# Altium PCB RobonAUT_PCB.PcbDoc
Units mm, origin at the board's own origin, x right, y up, seen from the top; angles counter-clockwise.
Board outline 220 x 140 mm, 2 copper layers (Top Layer, Bottom Layer), stack 1.586 mm thick; 37 components, 61 nets, 288 pads, 16 vias.
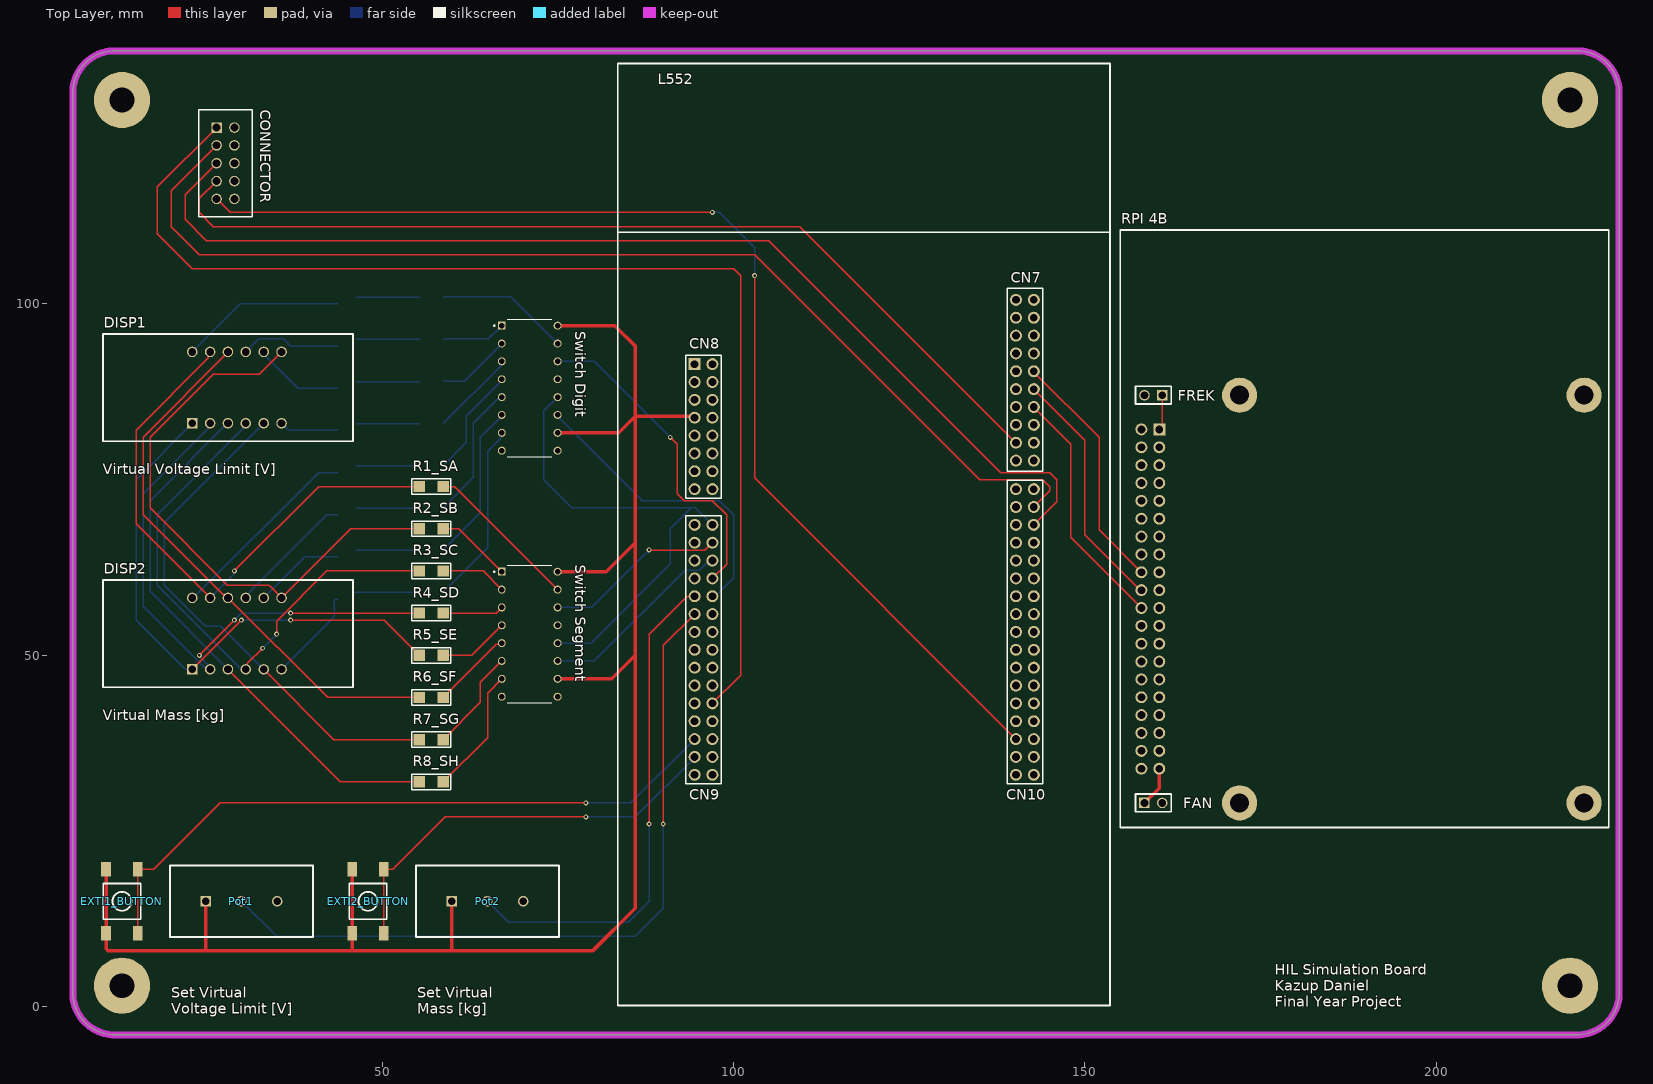
[diagram p0: Top Layer view]
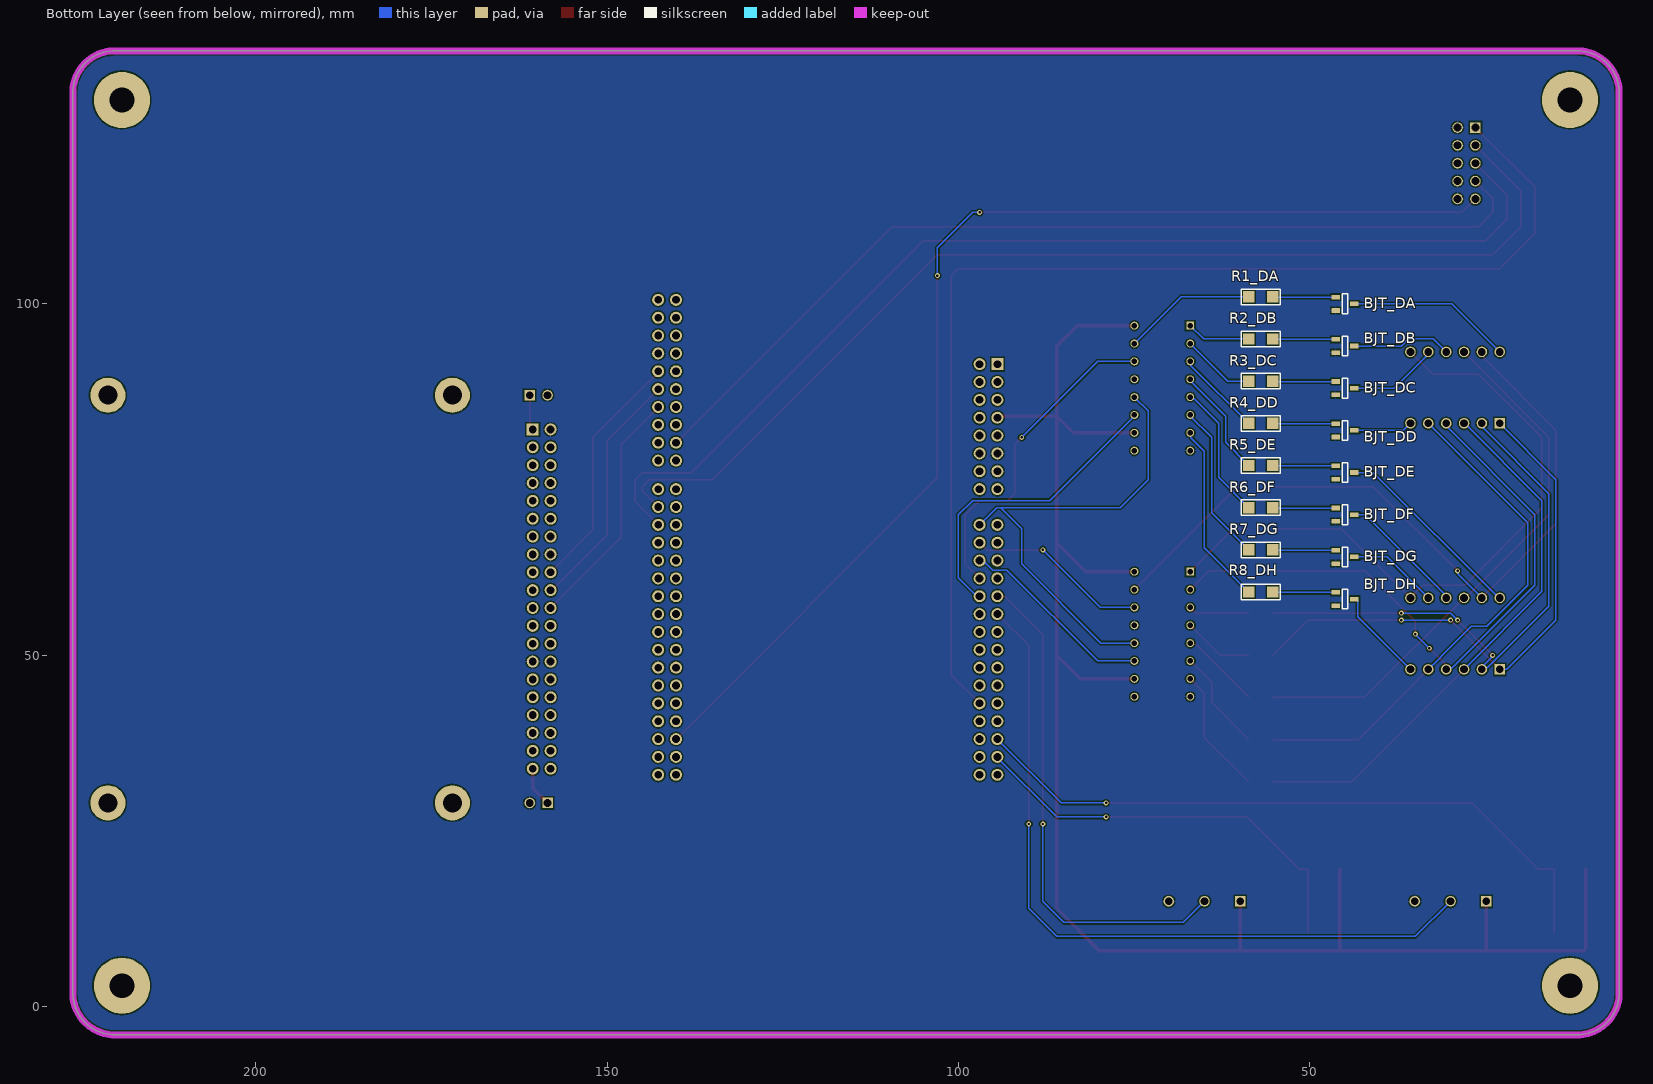
[diagram p1: Bottom Layer view, seen from below]
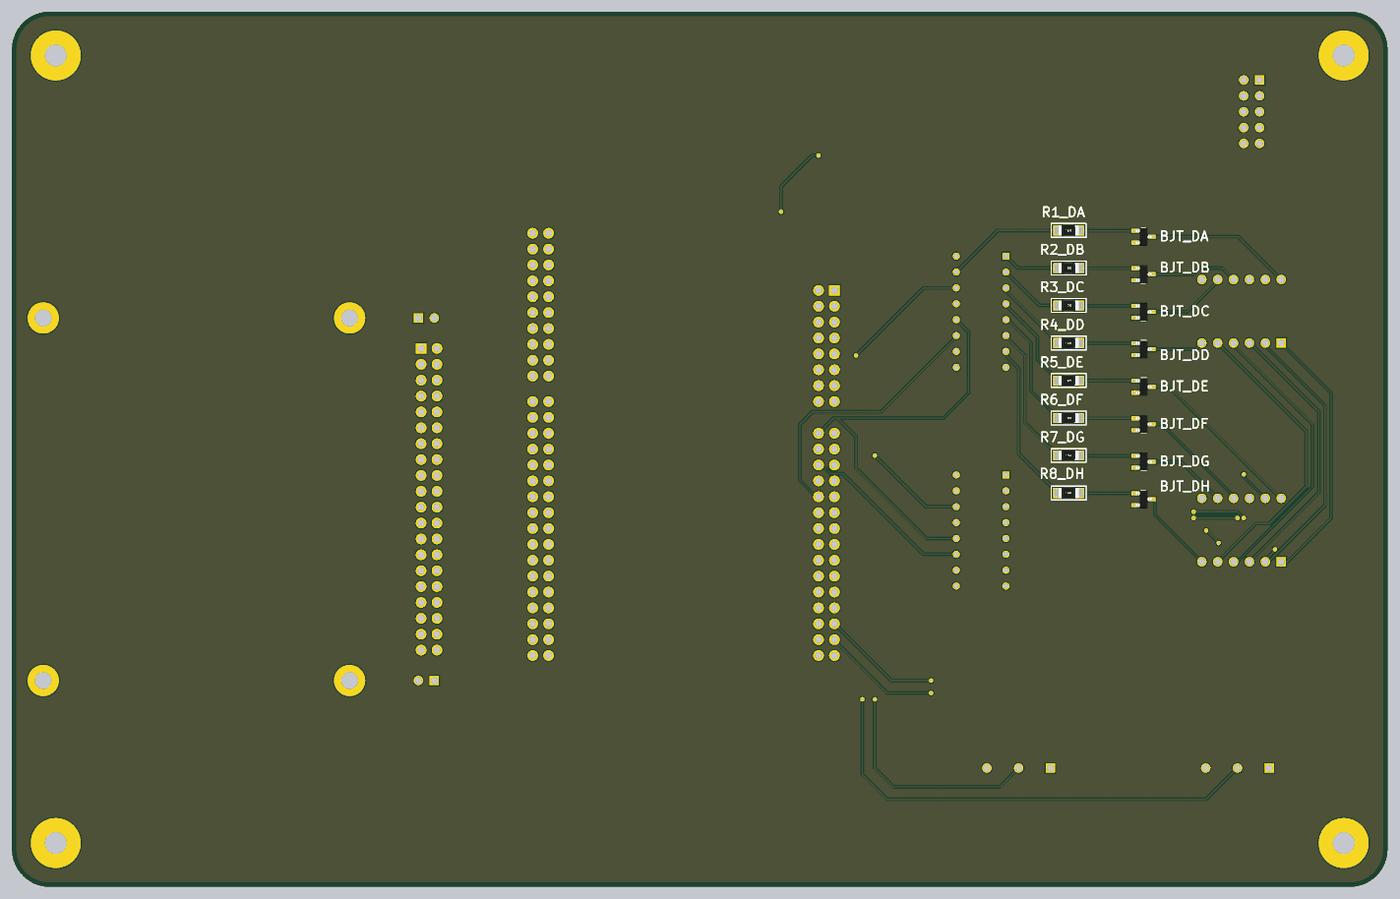
[diagram p2: 3D render of the assembled board from below, using the file's embedded part models]

## Layer stack, top to bottom
Top Solder: solder mask 0.0102, Solder Resist, Dk 3.5
Top Layer: signal copper 0.018
Dielectric1: core 1.55, FR-4, Dk 4.8
Bottom Layer: signal copper 0.018
Bottom Solder: solder mask 0.0102, Solder Resist, Dk 3.5

## Board outline
12,-4 220,-4 ccw(c220,2) 226,2 226,130 ccw(c220,130) 220,136 12,136 ccw(c12,130) 6,130 6,2 ccw(c12,2)

## Design rules (kind name [scope] priority, off if disabled: settings)
BoardOutlineClearance [All] p1: gap=0.25 ignorepadtopadclearanceinfootprint=FALSE
Clearance Clearance-xPP-xTP-xTT [All] p1: gap=0.15 ignorepadtopadclearanceinfootprint=FALSE except(0: Arc-Hole Track-Hole SMDPad-Hole THPad-Hole Via-Hole Fill-Hole Poly-Hole Region-Hole Text-Hole; 0.2: Arc-Poly Track-Poly SMDPad-Poly THPad-Poly Via-Poly Fill-Poly Poly-Poly)
ComponentClearance [All] p1: gap=0.25 collisioncheckmode=3 verticalgap=0.25 showdistances=FALSE
DiffPairsRouting [All] p1: maxlimit=0.25 minlimit=0.25 mostfreqgap=0.25 toplayer_minwidth=0.381 toplayer_maxwidth=0.381 toplayer_prefwidth=0.381 bottomlayer_minwidth=0.381 bottomlayer_maxwidth=0.381 bottomlayer_prefwidth=0.381 maxuncoupledlength=12.5
Height [All] p1: minheight=0 maxheight=45 prefheight=12.5
HoleSize HoleSize-PTH [All] p1: absolutevalues=TRUE maxlimit=5 minlimit=0.25 maxpercent=80.000 minpercent=20.000
HoleToHoleClearance [All] p1: gap=0.4 allowstackedmicrovias=TRUE
MinimumAnnularRing [All] p1: minimumring=0.125
MinimumSolderMaskSliver [All] p1: minsoldermaskwidth=0.08
PasteMaskExpansion [All] p1: expansion=-0.2
PlaneClearance PlaneClearance-IPI [All] p1: clearance=0.2
PlaneConnect [All] p1: pad.planeconnectstyle=Relief pad.reliefexpansion=0.175 pad.reliefentries=4 pad.reliefconductorwidth=0.2 pad.reliefairgap=0.2 via.planeconnectstyle=Direct via.reliefexpansion=0.175 via.reliefentries=4 via.reliefconductorwidth=0.2 via.reliefairgap=0.2
PolygonConnect PolygonConnect-xTW [All] p1: thpad.connectstyle=Relief thpad.reliefconductorwidth=0.2 thpad.reliefentries=4 thpad.polygonreliefangle="90 Angle" thpad.airgapwidth=0.2 smdpad.connectstyle=Relief smdpad.reliefconductorwidth=0.2 smdpad.reliefentries=4 smdpad.polygonreliefangle="90 Angle" smdpad.airgapwidth=0.2 via.connectstyle=Direct via.reliefconductorwidth=0.2 via.reliefentries=4 via.polygonreliefangle="90 Angle" via.airgapwidth=0.2
RoutingCorners [All] p1: cornerstyle=45-Degree minsetback=2.5 maxsetback=2.5
RoutingVias [All] p1: holewidth=0.35 width=0.7 viastyle="Through Hole" minholewidth=0.25 minwidth=0.6 maxholewidth=1.2 maxwidth=1.6
SilkToSilkClearance [All] p1: silktosilkclearance=0.05
SilkToSolderMaskClearance SilkscreenOverComponentPads [IsPad] p1: minsilkscreentomaskgap=0.15 clearancetoexposedcopper=TRUE
SolderMaskExpansion [All] p1: expansion=0 istentingtop=FALSE
SupplyNets "Schematic Supply Nets_1" [InNet('GND')] p1: voltage=0.000
SupplyNets "Schematic Supply Nets" [InNet('3V3')] p2: voltage=0.000
UnRoutedNet [All] p1: checkbadconnections=TRUE
Width Width-xTW [All] p1: maxlimit=3 minlimit=0.15 preferedwidth=0.2
17 further rules are at their usual default settings.

## Classes and differential pairs
component class MainSch: CONNECTOR FAN FREK L552 "RPI 4B"
component class HMISch: BJT_DA BJT_DB BJT_DC BJT_DD BJT_DE BJT_DF BJT_DG BJT_DH DISP1 DISP2 EXTI1_BUTTON EXTI2_BUTTON Pot1 Pot2 R1_DA R1_SA R2_DB R2_SB R3_DC R3_SC R4_DD R4_SD R5_DE R5_SE R6_DF R6_SF R7_DG R7_SG R8_DH R8_SH "Switch Digit" "Switch Segment"

## Components (designator, comment, footprint, x,y, rotation, side; value= is the part's Value field where it differs from the comment)
BJT_DA "BC817" FP_SOT23-3 45,100 r0 bottom
BJT_DB "BC817" FP_SOT23-3 45,94 r0 bottom
BJT_DC "BC817" FP_SOT23-3 45,88 r0 bottom
BJT_DD "BC817" FP_SOT23-3 45,82 r0 bottom
BJT_DE "BC817" FP_SOT23-3 45,76 r0 bottom
BJT_DF "BC817" FP_SOT23-3 45,70 r0 bottom
BJT_DG "BC817" FP_SOT23-3 45,64 r0 bottom
BJT_DH "BC817" FP_SOT23-3 45,58 r0 bottom
CONNECTOR "Connector 10" CONNECTOR-10P 26.46,125.08 r0 top locked
DISP1 "7SegDisp" 3461AS_FP 23,83 r90 top locked
DISP2 "7SegDisp" 3461AS_FP 23,48 r90 top locked
EXTI1_BUTTON "Button" FP_BTN_SMD 13,15 r0 top locked
EXTI2_BUTTON "Button" FP_BTN_SMD 48,15 r0 top locked
FAN "Venti" FP_CONN2_TUSKE_254MM 158.46,29 r270 top locked
FREK "FreqMeas" FP_CONN2_TUSKE_254MM 161,87 r90 top locked
L552 "NUCLEO-L552_soldered_pins" "FP_NUCLEO-144 inner connector" 86.84,101.58 r0 top locked
Pot1 "Connector" Potmeter_3C_FP 24.92,15 r90 top locked
Pot2 "Connector" Potmeter_3C_FP 59.92,15 r90 top locked
R1_DA "4.7K" FP_1206_RES 57,101 r180 bottom
R1_SA "100" FP_1206_RES 57,74 r180 top
R2_DB "4.7K" FP_1206_RES 57,95 r180 bottom
R2_SB "100" FP_1206_RES 57,68 r180 top
R3_DC "4.7K" FP_1206_RES 57,89 r180 bottom
R3_SC "100" FP_1206_RES 57,62 r180 top
R4_DD "4.7K" FP_1206_RES 57,83 r180 bottom
R4_SD "100" FP_1206_RES 57,56 r180 top
R5_DE "4.7K" FP_1206_RES 57,77 r180 bottom
R5_SE "100" FP_1206_RES 57,50 r180 top
R6_DF "4.7K" FP_1206_RES 57,71 r180 bottom
R6_SF "100" FP_1206_RES 57,44 r180 top
R7_DG "4.7K" FP_1206_RES 57,65 r180 bottom
R7_SG "100" FP_1206_RES 57,38 r180 top
R8_DH "4.7K" FP_1206_RES 57,59 r180 bottom
R8_SH "100" FP_1206_RES 57,32 r180 top
"RPI 4B" "Raspberry Pi 4B flipped" "Raspberry Pi 4B flipped" 172,87 r270 top locked
"Switch Digit" "SN74HC595N" DIP794W45P254L1969H508Q16 71,88 r0 top locked
"Switch Segment" "SN74HC595N" DIP794W45P254L1969H508Q16 71,53 r0 top locked

## Footprints (in the part's own frame and the unit in brackets; to place one, negate y for a bottom-side part, rotate by r counter-clockwise, add the part's x,y. Pads: shape width x height; smd on the part's side, far side on the other; paste and mask are expansions set on the pad)
3461AS_FP [mm] "7 segment display footprint"
  rect 1.5x1.5 hole 1.1: 1(0,0)
  round 1.5 hole 1.1: 2(10.16,0) 3(0,-2.54) 4(10.16,-2.54) 5(0,-5.08) 6(10.16,-5.08) 7(0,-7.62) 8(10.16,-7.62) 9(0,-10.16) 10(10.16,-10.16) 11(0,-12.7) 12(10.16,-12.7)
  silkscreen extent -2.54,-22.86 12.7,12.7
CONNECTOR-10P [mm]
  rect 1.5x1.5 hole 1.1: 1(0,0)
  round 1.5 hole 1.1: 2(2.54,0) 3(0,-2.54) 4(2.54,-2.54) 5(0,-5.08) 6(2.54,-5.08) 7(0,-7.62) 8(2.54,-7.62) 9(0,-10.16) 10(2.54,-10.16)
  silkscreen extent -2.54,-12.7 5.08,2.54
DIP794W45P254L1969H508Q16 [mm]
  rect 1.13x1.13 hole 0.78: 1(-3.97,8.89)
  round 1.13 hole 0.78: 2(-3.97,6.35) 3(-3.97,3.81) 4(-3.97,1.27) 5(-3.97,-1.27) 6(-3.97,-3.81) 7(-3.97,-6.35) 8(-3.97,-8.89) 9(3.97,-8.89) 10(3.97,-6.35) 11(3.97,-3.81) 12(3.97,-1.27) 13(3.97,1.27) 14(3.97,3.81) 15(3.97,6.35) 16(3.97,8.89)
  silkscreen extent -5.13,-9.77 3.17,9.77
FP_1206_RES [mm] "1206 ellenállás"
  rect 1.6x1.6 smd: 1(-1.7,0) 2(1.7,0)
  silkscreen extent -2.8,-1.1 2.8,1.1, body extent -1.6,-0.8 1.6,0.8, height 0.62
FP_BTN_SMD [mm] "SMD Push Button 6x6mm"
  rect 1.4x2.1 smd: 1(2.25,4.55) 2(2.25,-4.55) 3(-2.25,4.55) 4(-2.25,-4.55)
  silkscreen extent -2.67,-2.54 2.67,2.54, body extent -3,-5 3,5, height 5.1
FP_CONN2_TUSKE_254MM [mm] "2×1 tüskesor"
  rect 1.5x1.5 hole 1.1: 1(0,0)
  round 1.5 hole 1.1: 2(0,2.54)
  silkscreen extent -1.27,-1.27 1.27,3.81, body extent -1.27,-1.27 1.27,3.81, height 8.54
"FP_NUCLEO-144 inner connector" [mm]
  rect 1.7x1.7 hole 1.1: 1(7.62,-10.16)
  round 1.7 hole 1.1: 2(7.62,-12.7) 3(7.62,-15.24) 4(7.62,-17.78) 5(7.62,-20.32) 6(7.62,-22.86) 7(7.62,-25.4) 8(7.62,-27.94) 9(7.62,-33.02) 10(7.62,-35.56) 11(7.62,-38.1) 12(7.62,-40.64) 13(7.62,-43.18) 14(7.62,-45.72) 15(7.62,-48.26) 16(7.62,-50.8) 17(7.62,-53.34) 18(7.62,-55.88) 19(7.62,-58.42) 20(7.62,-60.96) 21(7.62,-63.5) 22(7.62,-66.04) 23(7.62,-68.58) 24(10.16,-10.16) 25(10.16,-12.7) 26(10.16,-15.24) 27(10.16,-17.78) 28(10.16,-20.32) 29(10.16,-22.86) 30(10.16,-25.4) 31(10.16,-27.94) 32(10.16,-33.02) 33(10.16,-35.56) 34(10.16,-38.1) 35(10.16,-40.64) 36(10.16,-43.18) 37(10.16,-45.72) 38(10.16,-48.26) 39(10.16,-50.8) 40(10.16,-53.34) 41(10.16,-55.88) 42(10.16,-58.42) 43(10.16,-60.96) 44(10.16,-63.5) 45(10.16,-66.04) 46(10.16,-68.58) 47(53.34,-1.016) 48(53.34,-3.556) 49(53.34,-6.096) 50(53.34,-8.636) 51(53.34,-11.176) 52(53.34,-13.716) 53(53.34,-16.256) 54(53.34,-18.796) 55(53.34,-21.336) 56(53.34,-23.876) 57(53.34,-27.94) 58(53.34,-30.48) 59(53.34,-33.02) 60(53.34,-35.56) 61(53.34,-38.1) 62(53.34,-40.64) 63(53.34,-43.18) 64(53.34,-45.72) 65(53.34,-48.26) 66(53.34,-50.8) 67(53.34,-53.34) 68(53.34,-55.88) 69(53.34,-58.42) 70(53.34,-60.96) 71(53.34,-63.5) 72(53.34,-66.04) 73(53.34,-68.58) 74(55.88,-1.016) 75(55.88,-3.556) 76(55.88,-6.096) 77(55.88,-8.636) 78(55.88,-11.176) 79(55.88,-13.716) 80(55.88,-16.256) 81(55.88,-18.796) 82(55.88,-21.336) 83(55.88,-23.876) 84(55.88,-27.94) 85(55.88,-30.48) 86(55.88,-33.02) 87(55.88,-35.56) 88(55.88,-38.1) 89(55.88,-40.64) 90(55.88,-43.18) 91(55.88,-45.72) 92(55.88,-48.26) 93(55.88,-50.8) 94(55.88,-53.34) 95(55.88,-55.88) 96(55.88,-58.42) 97(55.88,-60.96) 98(55.88,-63.5) 99(55.88,-66.04) 100(55.88,-68.58)
  silkscreen extent -3.3,-101.4 66.72,32.6, body extent -3.29,-101.4 66.71,32.6, height 18.5
FP_SOT23-3 [mm] "SOT23-3 tok"
  rect 1.2x0.65 smd: 1(1.327,-0.95) 2(1.327,0.95) 3(-1.327,0)
  silkscreen extent -0.4,-1.4 0.4,1.4, body extent -1.27,-1.46 1.27,1.46, height 0.97
Potmeter_3C_FP [mm] "3 pin potmeter"
  rect 1.5x1.5 hole 1.1: 1(0,0)
  round 1.5 hole 1.1: 2(0,-5.08) 3(0,-10.16)
  silkscreen extent -5.08,-15.24 5.08,5.08
"Raspberry Pi 4B flipped" [mm]
  round 5 hole 2.7: 0(0,49) 0(0,0) 0(58,49) 0(58,0)
  round 1.7 hole 1.1: 1(4.87,-13.97) 3(7.41,-13.97) 4(7.41,-11.43) 5(9.95,-13.97) 6(9.95,-11.43) 7(12.49,-13.97) 8(12.49,-11.43) 9(15.03,-13.97) 10(15.03,-11.43) 11(17.57,-13.97) 12(17.57,-11.43) 13(20.11,-13.97) 14(20.11,-11.43) 15(22.65,-13.97) 16(22.65,-11.43) 17(25.19,-13.97) 18(25.19,-11.43) 19(27.73,-13.97) 20(27.73,-11.43) 21(30.27,-13.97) 22(30.27,-11.43) 23(32.81,-13.97) 24(32.81,-11.43) 25(35.35,-13.97) 26(35.35,-11.43) 27(37.89,-13.97) 28(37.89,-11.43) 29(40.43,-13.97) 30(40.43,-11.43) 31(42.97,-13.97) 32(42.97,-11.43) 33(45.51,-13.97) 34(45.51,-11.43) 35(48.05,-13.97) 36(48.05,-11.43) 37(50.59,-13.97) 38(50.59,-11.43) 39(53.13,-13.97) 40(53.13,-11.43)
  rect 1.7x1.7 hole 1.1: 2(4.87,-11.43)
  silkscreen extent -23.49,-17 61.5,52.5, body extent 3.28,-15.24 54.72,-10.16, height 9

## Part data
BJT_DA BJT_DB BJT_DC BJT_DD BJT_DE BJT_DF BJT_DG BJT_DH: "NPN General-purpose Transistor", ComponentLink1Description="Manufacturer Link", ComponentLink1URL=http://www.semiconductors.philips.com/, ComponentLink2Description=Datasheet, ComponentLink2URL=http://www.semiconductors.philips.com/acrobat/datasheets/BC817_BC817W_BC337_5.pdf
CONNECTOR: library part "Connector 10 spec", "Special 10 pin ribbon connector"
DISP1 DISP2: library part 3461AS, "7 segment display sch"
EXTI1_BUTTON EXTI2_BUTTON: library part "Button 4P", "Push button"
FAN FREK: library part Connector_2pin, "2pin connector"
L552: library part NUCLEO-L552_inner, "https://www.st.com/resource/en/user_manual/um2581-stm32l5-nucleo144-board-mb1361-stmicroelectronics.pdf"
Pot1 Pot2: library part Potmeter_3pin, "3pin connector"
R1_DA R1_SA R2_DB R2_SB R3_DC R3_SC R4_DD R4_SD R5_DE R5_SE R6_DF R6_SF R7_DG R7_SG R8_DH R8_SH: library part RES, "Resistor"
"Switch Digit" "Switch Segment": Package=None, Availability=Unavailable, MP=SN74HC595N, Price=None

## Free pads (board coordinates)
  round 8 hole 3.5: 1(13,129) 2(13,3) 3(219,3) 4(219,129)

## Via types
v1: diameter 0.7, hole 0.35, Top Layer to Bottom Layer, 16 vias

## Nets (pads, with @x,y where several pads share a name; then routed paths per layer and width w, separated by ;. In a path a pad name is that pad's centre, name@x,y a point inside that pad or via, vN(x,y) a via of type N, cw(c..) or ccw(c..) an arc to the next point about the centre after c; other vN are vias at no path point)
3V3: "Switch Digit.10" "Switch Digit.16" "Switch Segment.10" "Switch Segment.16" EXTI1_BUTTON.3 EXTI1_BUTTON.4 EXTI2_BUTTON.3 EXTI2_BUTTON.4 L552.4 Pot1.1 Pot2.1 | length 252.8
  Top Layer w0.2: 24.92,8.08 25,8 ; 45.75,8.25 46,8 ; 59.92,8.08 60,8 ; L552.4@94.26,84 L552.4
  Top Layer w0.5: EXTI1_BUTTON.3 EXTI1_BUTTON.4 10.75,8.25 11,8 25,8 46,8 60,8 80,8 86,14 86,50 ; 24.92,8.08 Pot1.1 ; 45.75,8.25 EXTI2_BUTTON.4 EXTI2_BUTTON.3 ; 59.92,8.08 Pot2.1 ; 74.97,46.65 82.65,46.65 86,50 ; 74.97,61.89 81.89,61.89 86,66 ; 74.97,81.65 83.65,81.65 86,84 ; 74.97,96.89 83.11,96.89 86,94 86,84 ; L552.4@94.26,84 86,84 ; 86,50 86,66 ; 86,66 86,84
GND: "RPI 4B.1" "RPI 4B.8" "RPI 4B.12" "RPI 4B.15" "RPI 4B.28" "RPI 4B.31" "RPI 4B.36" "Switch Digit.8" "Switch Digit.13" "Switch Segment.8" "Switch Segment.13" BJT_DA.2 BJT_DB.2 BJT_DC.2 BJT_DD.2 BJT_DE.2 BJT_DF.2 BJT_DG.2 BJT_DH.2 CONNECTOR.2 CONNECTOR.4 CONNECTOR.6 CONNECTOR.8 CONNECTOR.10 FAN.2 FREK.2 L552.6 L552.7 L552.20 L552.37 L552.59 L552.65 L552.70 L552.77 L552.94 Pot1.3 Pot2.3
NetBJT_DA_1: BJT_DA.1 R1_DA.2 | length 9
  Bottom Layer w0.2: BJT_DA.1 55.25,100.95 R1_DA.2
NetBJT_DA_3: BJT_DA.3 DISP1.2 | length 23.5
  Bottom Layer w0.2: DISP1.2 29.84,100 BJT_DA.3
NetBJT_DB_1: BJT_DB.1 R2_DB.2 | length 9
  Bottom Layer w0.2: BJT_DB.1 55.25,94.95 R2_DB.2
NetBJT_DB_3: BJT_DB.3 DISP1.8 | length 14.2
  Bottom Layer w0.2: DISP1.8 32.46,95 36,95 37,94 BJT_DB.3
NetBJT_DC_1: BJT_DC.1 R3_DC.2 | length 9
  Bottom Layer w0.2: BJT_DC.1 55.25,88.95 R3_DC.2
NetBJT_DC_3: BJT_DC.3 DISP1.10 | length 12.8
  Bottom Layer w0.2: DISP1.10 33.16,92.84 38,88 BJT_DC.3
NetBJT_DD_1: BJT_DD.1 R4_DD.2 | length 9
  Bottom Layer w0.2: BJT_DD.1 55.25,82.95 R4_DD.2
NetBJT_DD_3: BJT_DD.3 DISP1.11 | length 8.4
  Bottom Layer w0.2: DISP1.11 36.7,82 BJT_DD.3
NetBJT_DE_1: BJT_DE.1 R5_DE.2 | length 9
  Bottom Layer w0.2: BJT_DE.1 55.25,76.95 R5_DE.2
NetBJT_DE_3: BJT_DE.3 DISP2.2 | length 28.1
  Bottom Layer w0.2: DISP2.2 23.16,58.16 41,76 BJT_DE.3
NetBJT_DF_1: BJT_DF.1 R6_DF.2 | length 9
  Bottom Layer w0.2: BJT_DF.1 55.25,70.95 R6_DF.2
NetBJT_DF_3: BJT_DF.3 DISP2.8 | length 18.2
  Bottom Layer w0.2: DISP2.8 30.62,58.503 42.117,70 BJT_DF.3
NetBJT_DG_1: BJT_DG.1 R7_DG.2 | length 9
  Bottom Layer w0.2: BJT_DG.1 55.25,64.95 R7_DG.2
NetBJT_DG_3: BJT_DG.3 DISP2.10 | length 12.9
  Bottom Layer w0.2: DISP2.10 39,64 BJT_DG.3
NetBJT_DH_1: BJT_DH.1 R8_DH.2 | length 9.3
  Bottom Layer w0.2: BJT_DH.1@46.052,58.95 BJT_DH.1 55.25,58.95 R8_DH.2
NetBJT_DH_3: BJT_DH.3 DISP2.11 | length 13.5
  Bottom Layer w0.2: DISP2.11 43.173,55.473 43.173,57.775 43.398,58 BJT_DH.3
NetCONNECTOR_1: CONNECTOR.1 L552.42 | length 166.6
  Top Layer w0.2: CONNECTOR.1 18,116.62 18,110 23,105 34,105 100,105 101,104 101,47.16 L552.42
NetCONNECTOR_3: CONNECTOR.3 L552.85 | length 158.4
  Top Layer w0.2: CONNECTOR.3 20,116.08 20,111 24,107 35,107 103,107 135,75 144,75 145,74 145,73.38 L552.85
NetCONNECTOR_5: CONNECTOR.5 L552.86 | length 157
  Top Layer w0.2: CONNECTOR.5 22,115.54 22,112 25,109 36,109 105,109 138,76 145,76 146,75 146,71.84 L552.86
NetCONNECTOR_7: CONNECTOR.7 L552.55 | length 135.2
  Top Layer w0.2: CONNECTOR.7 24,115 24,113 26,111 37,111 109.424,111 L552.55
NetCONNECTOR_9: CONNECTOR.9 L552.71 | length 164.7
  Top Layer w0.2: CONNECTOR.9 28.38,113 38,113 v1(97,113) ; v1(103,104) 103,75.26 L552.71
  Bottom Layer w0.2: v1(97,113) 98,113 103,108 v1(103,104)
NetDISP1_1: DISP1.1 DISP2.1 R5_SE.2 | length 79.5
  Top Layer w0.2: DISP2.1 v1(30,55) ; v1(37,55) 50.3,55 R5_SE.2
  Bottom Layer w0.2: DISP2.1 22,48 15,55 15,75 DISP1.1 ; v1(30,55) v1(37,55)
NetDISP1_3: DISP1.3 DISP2.3 R4_SD.2 | length 79.6
  Top Layer w0.2: v1(24,50) v1(29,55) ; v1(37,56) R4_SD.2
  Bottom Layer w0.2: v1(24,50) 24,49.865 25.54,48.325 DISP2.3 25.291,48.249 24.751,48.249 16,57 16,73 25.291,82.291 25.291,82.751 DISP1.3 ; v1(29,55) 30,56 v1(37,56)
NetDISP1_4: DISP1.4 DISP2.4 R1_SA.2 | length 80.3
  Top Layer w0.2: DISP2.4 15,68.7 15,82 25.308,92.308 25.308,92.928 DISP1.4 ; v1(29,62) 41,74 R1_SA.2
  Bottom Layer w0.2: DISP2.4 28.904,61.524 28.904,61.904 v1(29,62)
NetDISP1_5: DISP1.5 DISP2.5 R8_SH.2 | length 78.1
  Top Layer w0.2: DISP2.5 44.08,32 R8_SH.2
  Bottom Layer w0.2: DISP2.5 17,59.08 17,72 28,83 DISP1.5
NetDISP1_6: DISP1.6 DISP2.6 R6_SF.2 | length 78.2
  Top Layer w0.2: DISP1.6 28.08,93.08 16,81 16,70 27.84,58.16 DISP2.6 42.24,44 R6_SF.2
NetDISP1_7: DISP1.7 DISP2.7 R3_SC.2 | length 77.7
  Top Layer w0.2: DISP2.7 30.852,48.232 30.852,48.852 v1(33,51) ; v1(35,53) 35,54.849 42.151,62 R3_SC.2
  Bottom Layer w0.2: DISP2.7 30.388,48.232 29.768,48.232 18,60 18,70 30.268,82.268 30.268,82.296 30.62,82.648 DISP1.7 ; v1(33,51) v1(35,53)
NetDISP1_9: DISP1.9 DISP2.9 R7_SG.2 | length 74.3
  Top Layer w0.2: DISP2.9 43.16,38 R7_SG.2
  Bottom Layer w0.2: DISP2.9 31.76,49.4 31.751,49.4 31.4,49.751 31.4,49.76 27.036,54.124 24.876,54.124 19,60 19,68.874 26.126,76 26.16,76 DISP1.9
NetDISP1_12: DISP1.12 DISP2.12 R2_SB.2 | length 81.4
  Top Layer w0.2: DISP1.12 32.54,90 26,90 17,81 17,71 28,60 33.883,60 34,59.883 34,59.86 DISP2.12 45.54,68 R2_SB.2
NetEXTI1_BUTTON_1: EXTI1_BUTTON.1 EXTI1_BUTTON.2 L552.21 | length 96
  Top Layer w0.2: EXTI1_BUTTON.2 EXTI1_BUTTON.1 17.55,19.55 27,29 v1(79,29)
  Bottom Layer w0.2: v1(79,29) 85.38,29 L552.21
NetEXTI2_BUTTON_1: EXTI2_BUTTON.1 EXTI2_BUTTON.2 L552.22 | length 60
  Top Layer w0.2: EXTI2_BUTTON.2 EXTI2_BUTTON.1 51.55,19.55 59,27 v1(79,27)
  Bottom Layer w0.2: v1(79,27) 86,27 94.46,35.46 L552.22
NetFAN_1: "RPI 4B.40" FAN.1 | length 5.7
  Top Layer w0.5: FAN.1 160.57,31.11 160.57,33.87
NetFREK_1: "RPI 4B.2" FREK.1 | length 5
  Top Layer w0.2: 160.57,82.13 161,82.56 FREK.1
NetL552_13: L552.13 Pot2.2 | length 72.2
  Top Layer w0.2: v1(88,26) 88,53 93.31,58.31 94.37,58.31 L552.13
  Bottom Layer w0.2: Pot2.2 68,12 85,12 88,15 v1(88,26)
NetL552_14: L552.14 Pot1.2 | length 107.4
  Top Layer w0.2: v1(90,26) 90,51.4 L552.14
  Bottom Layer w0.2: Pot1.2 35,10 86,10 90,14 v1(90,26)
NetL552_32: "Switch Digit.12" "Switch Segment.12" L552.32 | length 69.4
  Top Layer w0.2: 74.73,86.73 74.97,86.73
  Bottom Layer w0.2: 74.97,51.73 79.73,51.73 91,63 91,68 94,71 ; 74.97,86.73 73,84.76 73,75 77,71 94,71 ; L552.32 94.56,71 94,71
NetL552_33: "Switch Segment.14" L552.33 | length 25.9
  Top Layer w0.2: v1(88,65) 88.086,64.914 95.894,64.914 L552.33
  Bottom Layer w0.2: 74.97,56.81 79.81,56.81 v1(88,65) ; L552.33 L552.33@97.02,66.02
NetL552_34: "Switch Segment.11" L552.34 | length 27.9
  Bottom Layer w0.2: 74.97,49.19 80.19,49.19 93.096,62.096 95.096,62.096 96.193,63.193 96.713,63.193 L552.34
NetL552_35: "Switch Digit.14" L552.35 | length 47.1
  Top Layer w0.2: v1(91,81) 92,80 92,73 93,72 97,72 99,70 99,62.94 L552.35
  Bottom Layer w0.2: 74.97,91.81 80.19,91.81 v1(91,81)
NetL552_36: "Switch Digit.11" L552.36 | length 44.1
  Bottom Layer w0.2: 74.97,84.19 74.97,84.03 87,72 98,72 100,70 100,61 97.4,58.4 L552.36
NetL552_78: "RPI 4B.17" L552.78 | length 34.9
  Top Layer w0.2: L552.78 142.72,90.28 152,81 152,67.84 158.03,61.81
NetL552_79: "RPI 4B.19" L552.79 | length 35
  Top Layer w0.2: L552.79 150,80.584 150,67.117 157.847,59.27 158.03,59.27
NetL552_80: "RPI 4B.21" L552.80 | length 34.9
  Top Layer w0.2: L552.80 142.72,85.28 148,80 148,66.76 158.03,56.73
NetR1_DA_1: "Switch Digit.15" R1_DA.1 | length 19
  Bottom Layer w0.2: R1_DA.1 68.32,101 74.97,94.35
NetR1_SA_1: "Switch Segment.15" R1_SA.1 | length 22.3
  Top Layer w0.2: R1_SA.1 60.32,74 74.97,59.35
NetR2_DB_1: "Switch Digit.1" R2_DB.1 | length 9.1
  Bottom Layer w0.2: R2_DB.1 65.14,95 67.03,96.89
NetR2_SB_1: "Switch Segment.1" R2_SB.1 | length 10.9
  Top Layer w0.2: R2_SB.1 60.92,68 67.03,61.89
NetR3_DC_1: "Switch Digit.2" R3_DC.1 | length 10.5
  Bottom Layer w0.2: R3_DC.1 61.68,89 67.03,94.35
NetR3_SC_1: "Switch Segment.2" R3_SC.1 | length 9.4
  Top Layer w0.2: R3_SC.1 64.38,62 67.03,59.35
NetR4_DD_1: "Switch Digit.3" R4_DD.1 | length 12.3
  Bottom Layer w0.2: R4_DD.1 66.852,91.152 66.852,91.632 67.03,91.81
NetR4_SD_1: "Switch Segment.3" R4_SD.1 | length 8.7
  Top Layer w0.2: R4_SD.1 66.22,56 67.03,56.81
NetR5_DE_1: "Switch Digit.4" R5_DE.1 | length 15.7
  Bottom Layer w0.2: R5_DE.1 62,80.3 62,84 67.03,89.03 67.03,89.27
NetR5_SE_1: "Switch Segment.4" R5_SE.1 | length 10.1
  Top Layer w0.2: R5_SE.1 62.76,50 67.03,54.27
NetR6_DF_1: "Switch Digit.5" R6_DF.1 | length 19.4
  Bottom Layer w0.2: R6_DF.1 63,75.3 63,83 66.468,86.468 66.517,86.468 66.778,86.73 67.03,86.73
NetR6_SF_1: "Switch Segment.5" R6_SF.1 | length 11.5
  Top Layer w0.2: R6_SF.1 66.252,51.552 66.852,51.552 67.03,51.73
NetR7_DG_1: "Switch Digit.6" R7_DG.1 | length 22.6
  Bottom Layer w0.2: R7_DG.1 64,70.3 64,81 67.03,84.03 67.03,84.19
NetR7_SG_1: "Switch Segment.6" R7_SG.1 | length 14.6
  Top Layer w0.2: R7_SG.1 64,43.3 64,46.16 67.03,49.19
NetR8_DH_1: "Switch Digit.7" R8_DH.1 | length 26.1
  Bottom Layer w0.2: R8_DH.1 65,65.3 65,79 66.928,80.928 66.928,81.548 67.03,81.65
NetR8_SH_1: "Switch Segment.7" R8_SH.1 | length 18.1
  Top Layer w0.2: R8_SH.1 65,38.3 65,44.62 67.03,46.65
pads on no net: "RPI 4B.0" "RPI 4B.3" "RPI 4B.4" "RPI 4B.5" "RPI 4B.6" "RPI 4B.7" "RPI 4B.9" "RPI 4B.10" "RPI 4B.11" "RPI 4B.13" "RPI 4B.14" "RPI 4B.16" "RPI 4B.18" "RPI 4B.20" "RPI 4B.22" "RPI 4B.23" "RPI 4B.24" "RPI 4B.25" "RPI 4B.26" "RPI 4B.27" "RPI 4B.29" "RPI 4B.30" "RPI 4B.32" "RPI 4B.33" "RPI 4B.34" "RPI 4B.35" "RPI 4B.37" "RPI 4B.38" "RPI 4B.39" "Switch Digit.9" "Switch Segment.9" L552.1 L552.2 L552.3 L552.5 L552.8 L552.9 L552.10 L552.11 L552.12 L552.15 L552.16 L552.17 L552.18 L552.19 L552.23 L552.24 L552.25 L552.26 L552.27 L552.28 L552.29 L552.30 L552.31 L552.38 L552.39 L552.40 L552.41 L552.43 L552.44 L552.45 L552.46 L552.47 L552.48 L552.49 L552.50 L552.51 L552.52 L552.53 L552.54 L552.56 L552.57 L552.58 L552.60 L552.61 L552.62 L552.63 L552.64 L552.66 L552.67 L552.68 L552.69 L552.72 L552.73 L552.74 L552.75 L552.76 L552.81 L552.82 L552.83 L552.84 L552.87 L552.88 L552.89 L552.90 L552.91 L552.92 L552.93 L552.95 L552.96 L552.97 L552.98 L552.99 L552.100

## Polygon pours and split planes (outlines as drawn)
GND on Bottom Layer "Bottom_GND" (solid, remove dead copper, pour order 0): -5,148 -3,146 239,146 239,-16 237,-18 -7,-18 -7,146

## Keep-outs
Keep-Out Layer:
  the board outline again, w1

## Silkscreen, mask and mechanical layers (free items; w line width, h text height)
Top Overlay:
  text "Virtual Voltage Limit [V]" at 10.254,75.762 h1.52
  text "Virtual Mass [kg]" at 10.254,40.762 h1.52
  text "HIL Simulation Board / Kazup Daniel / Final Year Project" at 177,0 h1.52
  text "Set Virtual / Voltage Limit [V]" at 20,-1 h1.52
  text "Set Virtual / Mass [kg]" at 55,-1 h1.52
Mechanical 1:
  the board outline again, w0.2

## Text inside footprints (layer, text, board x,y; h text height)
L552: Top Overlay "CN10" at 138.783,29.444 h1.52; Top Overlay "CN7" at 139.418,102.977 h1.52; Top Overlay "CN8" at 93.698,93.579 h1.52; Top Overlay "CN9" at 93.698,29.444 h1.52